# Altium PCB PCB1.PcbDoc
Units mil, origin at the board's own origin, x right, y up, seen from the top; angles counter-clockwise.
Board outline 1800 x 1200 mil, 2 copper layers (Top Layer, Bottom Layer); 26 components, 22 nets, 85 pads, 1 vias.
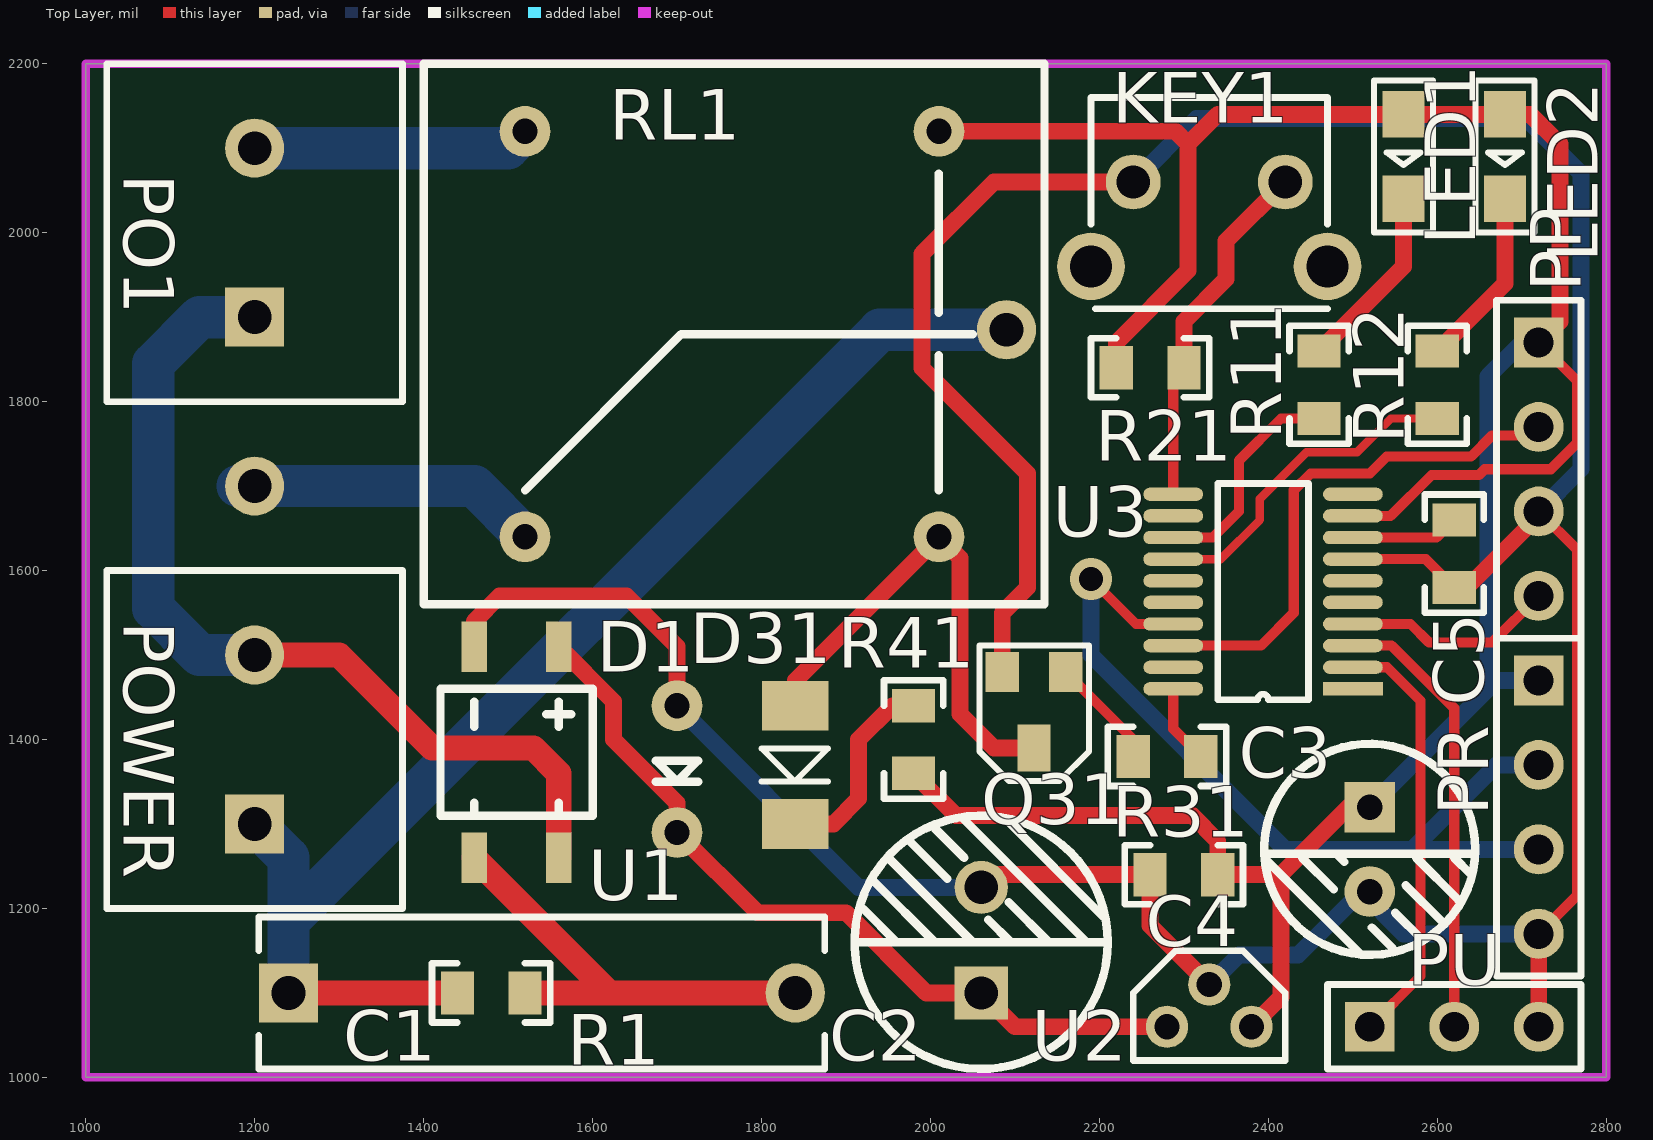
[diagram p0: Top Layer view]
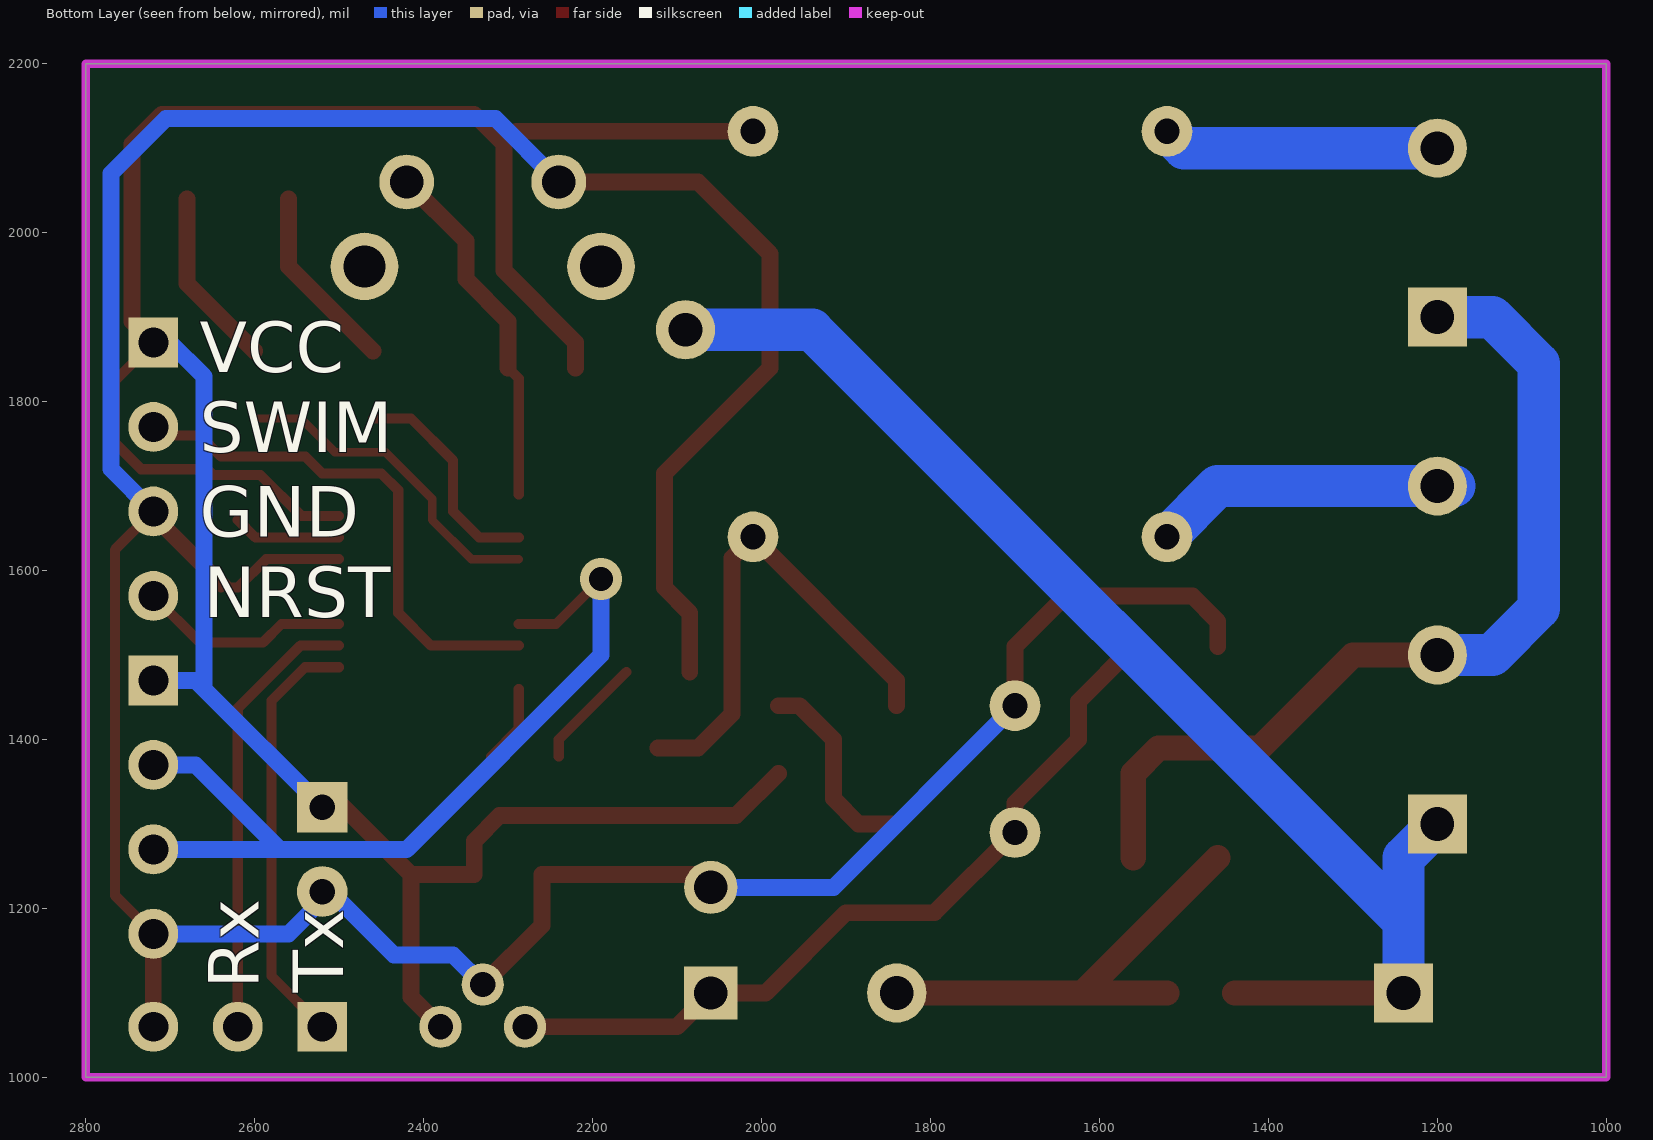
[diagram p1: Bottom Layer view, seen from below]

## Layer stack, top to bottom
Top Layer: signal copper 1.4
Dielectric: dielectric 12.6, FR-4, Dk 4.8
Bottom Layer: signal copper 1.4

## Board outline
1000,1000 1000,2200 2800,2200 2800,1000

## Design rules (kind name [scope] priority, off if disabled: settings)
Clearance [All] p1: gap=10
ComponentClearance [All] p1 off: gap=10 collisioncheckmode=3 verticalgap=10 showdistances=FALSE
PolygonConnect [All] p1: connectstyle=Relief reliefconductorwidth=10 reliefentries=4 polygonreliefangle="90 Angle"
RoutingVias [All] p1: holewidth=28 width=50 viastyle="Through Hole" minholewidth=28 minwidth=50 maxholewidth=28 maxwidth=50
SilkToSilkClearance [All] p1 off: silktosilkclearance=10
SilkscreenOverComponentPads [All] p1 off: minsilkscreentomaskgap=10
SolderMaskExpansion [All] p1: expansion=4
TestPointUsage [All] p1: valid=0 allowmultiple=FALSE
Testpoint [All] p1: side=15 testpointundercomponent=TRUE minsize=40 maxsize=100 preferedsize=60 minholesize=0 maxholesize=40 preferedholesize=32 testpointgrid=1 style=1023 order=0123456789
Width [All] p1: maxlimit=50 minlimit=10 preferedwidth=20
21 further rules are at their usual default settings.

## Components (designator, comment, footprint, x,y, rotation, side; value= is the part's Value field where it differs from the comment)
C1 "Cap" Cap3 1240,1100 r0 top
C2 "Cap Pol2" CAP1.25 2060,1100 r90 top
C3 "Cap Pol2" CAP1 2520,1320 r270 top
C4 "Cap" 0805 2260,1240 r0 top
C5 "Cap" 0805 2620,1660 r270 top
D1 "Diode_S" Dinode3 1700,1440 r270 top
D31 "Diode" DINODE 1840,1440 r270 top
KEY1 "KEY01" Key_v 2420,2060 r270 top
LED1 "LED1" LED 2560,2140 r270 top
LED2 "LED1" LED 2680,2140 r270 top
PO1 "Header 2" KF301-2P 1200,1900 r90 top
POWER "Header 2" KF301-2P 1200,1300 r90 top
PP "Header 4" HDR1X4 2720,1870 r270 top
PR "Header 4" HDR1X4 2720,1470 r270 top
PU "Header 3" HDR1X3 2520,1060 r0 top
Q31 "S8050" SOT23 2160,1480 r180 top
R1 "Res" 0805 1440,1100 r0 top
R11 "Res" 0805 2460,1780 r90 top
R12 "Res" 0805 2600,1780 r90 top
R21 "Res" 0805 2300,1840 r180 top
R31 "Res" 0805 2240,1380 r0 top
R41 "Res" 0805 1980,1440 r270 top
RL1 "Relay" Relay_SRS 1520,2120 r0 top
U1 "Rectifier" MB6S 1460,1260 r90 top
U2 "7805" TO-92A 2380,1060 r180 top
U3 "STM8S003F3" SSOP20 2500,1460 r180 top

## Footprints (in the part's own frame and the unit in brackets; to place one, negate y for a bottom-side part, rotate by r counter-clockwise, add the part's x,y. Pads: shape width x height; smd on the part's side, far side on the other; paste and mask are expansions set on the pad)
0805 [mm] "Chip Resistor, Body 2.0x1.2mm, IPC High Density"
  rect 1x1.3 smd: 1(0,0) 2(2.032,0)
  silkscreen extent -0.76,-0.89 2.79,0.89
CAP1 [mil]
  rect 60x60 hole 30: 1(0,0)
  round 60 hole 30: 2(100,0)
  silkscreen extent -75,-125 175,125
CAP1.25 [mm]
  rect 1.6x1.6 hole 1: 1(0,0)
  round 1.6 hole 1: 2(3.175,0)
  silkscreen extent -2.29,-3.81 5.33,3.81
Cap3 [mil] "15mm"
  rect 70x70 hole 40: 1(0,0)
  round 70 hole 40: 2(600,0)
  silkscreen extent -35,-90 635,90
DINODE [mm]
  rect 1.5x2 smd: A(0,0) K(3.556,0)
  silkscreen extent 1.28,-1.02 2.28,0.98
Dinode3 [mil]
  round 60 hole 30: A(0,0) K(150,0)
  silkscreen extent 65,-25 90,25
HDR1X3 [mm] "Connector; Header; 3 Position"
  rect 1.5x1.5 hole 0.9: 1(0,0)
  round 1.5 hole 0.9: 2(2.54,0) 3(5.08,0)
  silkscreen extent -1.27,-1.27 6.35,1.27
HDR1X4 [mm] "Connector; Header; 4 Position"
  rect 1.5x1.5 hole 0.9: 1(0,0)
  round 1.5 hole 0.9: 2(2.54,0) 3(5.08,0) 4(7.62,0)
  silkscreen extent -1.27,-1.27 8.89,1.27
Key_v [mil]
  round 65 hole 39.37: 1(0,0) 3(0,-180)
  round 80 hole 50: 2(100,50) 4(100,-230)
  silkscreen extent -100,-230 150,50
KF301-2P [mil] "Connector; Header; 2 Position"
  rect 70x70 hole 40: 1(0,0)
  round 70 hole 40: 2(200,0)
  silkscreen extent -100,-175 300,175
LED [mm]
  rect 1.4x1.27 smd: A(0,0) K(2.54,0)
  silkscreen extent -1.02,-0.89 3.56,0.89
MB6S [mil]
  rect 60x30 smd: 1(0,0) 2(0,-100) 3(250,-100) 4(250,0)
  silkscreen extent 50,-140 200,40
Relay_SRS [mil]
  round 60 hole 30: 1(0,0) 2(0,-480) 3(490,0) 4(490,-480)
  round 70 hole 40: 5(570,-235)
  silkscreen extent -120,-560 615,80
SOT23 [mm]
  rect 1x1.2 smd: B(0,0) E(1.905,0)
  rect 1x1.4 smd: C(0.952,2.286)
  silkscreen extent -0.71,-0.79 2.6,3.27
SSOP20 [mm]
  rect 1.8x0.4 smd: 1(0,0)
  oval 1.8x0.4 smd: 2(0,-0.65) 3(0,-1.3) 4(0,-1.95) 5(0,-2.6) 6(0,-3.25) 7(0,-3.9) 8(0,-4.55) 9(0,-5.2) 10(0,-5.85) 11(5.4,-5.85) 12(5.4,-5.2) 13(5.4,-4.55) 14(5.4,-3.9) 15(5.4,-3.25) 16(5.4,-2.6) 17(5.4,-1.95) 18(5.4,-1.3) 19(5.4,-0.65) 20(5.4,0)
  silkscreen extent 1.33,-6.18 4.07,0.33
TO-92A [mil]
  round 50 hole 30: 1(0,0) 2(50,-50) 3(100,0)
  silkscreen extent -40,-90 140,40

## Part data
C1 C4 C5: "Capacitor"
C2 C3: "Polarized Capacitor (Axial)"
D1 D31: "Default Diode"
KEY1: library part KEY
LED1 LED2: "Typical RED GaAs LED"
PO1 POWER: "Header, 2-Pin"
PP PR: "Header, 4-Pin"
PU: "Header, 3-Pin"
Q31: "NPN General Purpose Amplifier"
R1 R11 R12 R21: library part Res2, "Resistor"
R31 R41: "Resistor"

## Free pads (board coordinates)
  round 70 hole 40: 0(1200,1700)

## Via types
v1: diameter 50, hole 28, Top Layer to Bottom Layer, 1 vias

## Nets (pads, with @x,y where several pads share a name; then routed paths per layer and width w, separated by ;. In a path a pad name is that pad's centre, name@x,y a point inside that pad or via, vN(x,y) a via of type N, cw(c..) or ccw(c..) an arc to the next point about the centre after c; other vN are vias at no path point)
KEY1: KEY1.1 R21.1 U3.11 | length 424.6
  Top Layer w12: U3.11 2287.4,1827.4 R21.1
  Top Layer w20: R21.1 2300,1895 2350,1945 2350,1990 KEY1.1
LED1: R11.1 U3.13 | length 266.1
  Top Layer w12: U3.13 2334.13,1639.13 2365,1670 2365,1730 2415,1780 R11.1
LED2: R12.1 U3.14 | length 396.2
  Top Layer w10: U3.14 2343.54,1613.54 2390,1660 2390,1685 2445,1740 2505,1740 2545,1780 R12.1
NetC1_2: C1.2 R1.2 U1.1 | length 546.3
  Top Layer w30: U1.1 1620,1100 ; R1.2 1620,1100 ; C1.2 1620,1100
NetC2_1: C2.1 D1.K U1.3 U2.3 | length 953.3
  Top Layer w20: U1.3 1625,1445 1625,1400 1700,1325 D1.K 1795,1195 1900,1195 1995,1100 C2.1 2100,1060 U2.3
NetD31_K: D31.K R41.1 | length 239
  Top Layer w20: D31.K 1885,1300 1915,1330 1915,1400 1955,1440 R41.1
NetLED1_K: LED1.K R11.2 | length 221.4
  Top Layer w20: R11.2 2560,1960 LED1.K
NetLED2_K: LED2.K R12.2 | length 213.1
  Top Layer w20: R12.2 2680,1940 LED2.K
NetQ31_B: Q31.B R31.1 | length 133.1
  Top Layer w12: Q31.B 2240,1400 R31.1
NRST: PP.4 U3.4 | length 284.6
  Top Layer w12: U3.4 2568.23,1536.77 2590,1515 2665,1515 PP.4 2696.77,1546.77
RCV: PR.2 PR.3 U3.17 | length 1040.3
  Top Layer w12: v1(2190,1590) 2243.23,1536.77 U3.17
  Bottom Layer w20: v1(2190,1590) 2190,1500 2420,1270 2570,1270 ; PR.3@2710,1280 PR.3 2570,1270 ; PR.2 2670,1370 2570,1270
RELAY1: R31.2 U3.20 | length 93.5
  Top Layer w12: U3.20 2287.4,1412.6 R31.2
RLC1: D31.A Q31.C RL1.4 | length 594.8
  Top Layer w20: D31.A 1840,1470 RL1.4 2035,1615 2035,1430 2075,1390 Q31.C
RLI1: C1.1 POWER.1 R1.1 RL1.5 | length 1556.5
  Top Layer w30: C1.1 R1.1
  Bottom Layer w50: POWER.1 1240,1260 1240,1185 ; C1.1 1240,1185 ; RL1.5 1940,1885 1240,1185
RLO1: PO1.2 RL1.1 | length 328.3
  Bottom Layer w50: PO1.2 1500,2100 RL1.1
RXD: PU.2 U3.3 | length 527.8
  Top Layer w12: U3.3 2545.87,1511.18 2620,1437.05 PU.2
SWIM: PP.2 U3.18 | length 620.6
  Top Layer w12: U3.18 2391.18,1511.18 2430,1550 2430,1695 2450,1715 2520,1715 2540,1735 2640,1735 2665,1760 PP.2@2720,1760
TXD: PU.1 U3.2 | length 507.2
  Top Layer w12: U3.2 2540.34,1485.59 2580,1445.93 2580,1120 PU.1
V220B: PO1.1 POWER.2 U1.2 | length 1093.6
  Top Layer w30: POWER.2 1300,1500 1410,1390 1530,1390 1560,1360 U1.2
  Bottom Layer w50: POWER.2 1135,1500 1080,1555 1080,1845 1135,1900 PO1.1
VCAP: C5.1 U3.8 | length 128.6
  Top Layer w12: U3.8 2599.13,1639.13 C5.1
VDD: C3.1 C4.2 LED1.A LED2.A PP.1 PR.1 R21.2 R41.2 RL1.3 U2.1 U3.9 | length 3304.3
  Top Layer w12: U3.9 2544.72,1664.72 2593,1713 2649.11,1713 2656.11,1720 2734.39,1720 2765.53,1751.14 2765.53,1824.47 PP.1
  Top Layer w20: R41.2 2030,1310 2310,1310 2340,1280 C4.2 2415,1240 ; RL1.3 2290,2120 2305,2105 ; R21.2 2220,1870 2305,1955 2305,2105 ; U2.1 2415,1095 2415,1240 ; C3.1 2495,1320 2415,1240 ; PP.1 2745,1895 2745,2105 2710,2140 LED2.A LED1.A 2340,2140 2305,2105
  Bottom Layer w20: C3.1 2660,1460 ; PR.1 2670,1470 2660,1460 ; PP.1 2700,1870 2660,1830 2660,1460
VSS: C2.2 C3.2 C4.1 C5.2 D1.A KEY1.3 PP.3 PR.4 PU.3 Q31.E U1.4 U2.2 U3.7 | length 4533
  Top Layer w12: U3.7 2586.46,1613.54 C5.2 2630,1580 PP.3 2765.53,1624.47 2765.53,1215.53 PR.4 ; C5.2@2640,1580 PP.3@2720,1660
  Top Layer w20: U1.4 1460,1540 1490,1570 1640,1570 1700,1510 D1.A ; C2.2 2075,1240 C4.1 2260,1180 U2.2 ; Q31.E 2085,1550 2115,1580 2115,1715 1990,1840 1990,1975 2075,2060 KEY1.3 ; PU.3 PR.4@2720,1160
  Bottom Layer w20: D1.A 1915,1225 C2.2 ; KEY1.3 2315,2135 2705,2135 2770,2070 2770,1720 PP.3 ; U2.2 2365,1145 2435,1145 C3.2@2510,1220 ; C3.2 C3.2@2510,1220 ; PR.4 2560,1170 C3.2@2510,1220
pads on no net: KEY1.2 KEY1.4 RL1.2 U3.1 U3.5 U3.6 U3.10 U3.12 U3.15 U3.16 U3.19
copper on no net: | length 364.9
  Bottom Layer w50: 1180,1700 1460,1700 1520,1640

## Keep-outs
Keep-Out Layer:
  the board outline again, w10

## Silkscreen, mask and mechanical layers (free items; w line width, h text height)
Bottom Overlay:
  text "VCC" at 2665,1835 h60
  text "SWIM" at 2665,1740 h60
  text "GND" at 2665,1640 h60
  text "NRST" at 2660,1545 h60
  text "Rx" at 2595,1105 h60 r270
  text "Tx" at 2495,1100 h60 r270
Bottom Solder:
  lines w50: 1180,1700 1460,1700 1520,1640 ; 1200,1300 1240,1260 1240,1185 ; 1200,1500 1135,1500 1080,1555 1080,1845 1135,1900 1200,1900 ; 1200,2100 1500,2100 1520,2120 ; 1240,1100 1240,1185 ; 2090,1885 1940,1885 1240,1185